# Altium PCB cover.PcbDoc
Units mm, origin at the board's own origin, x right, y up, seen from the top; angles counter-clockwise.
Board outline 14.78 x 71.02 mm, 2 copper layers (Top1, Bottom2), stack 1.071 mm thick; 1 components, 75 nets, 24 pads, 0 vias.
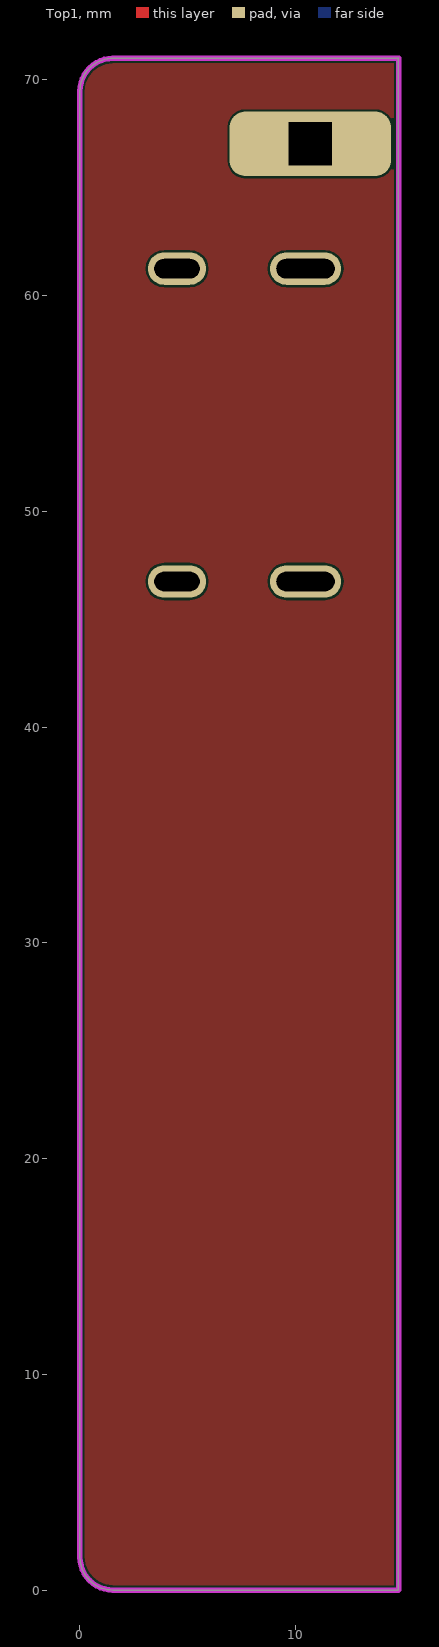
[diagram p0: Top1 view]
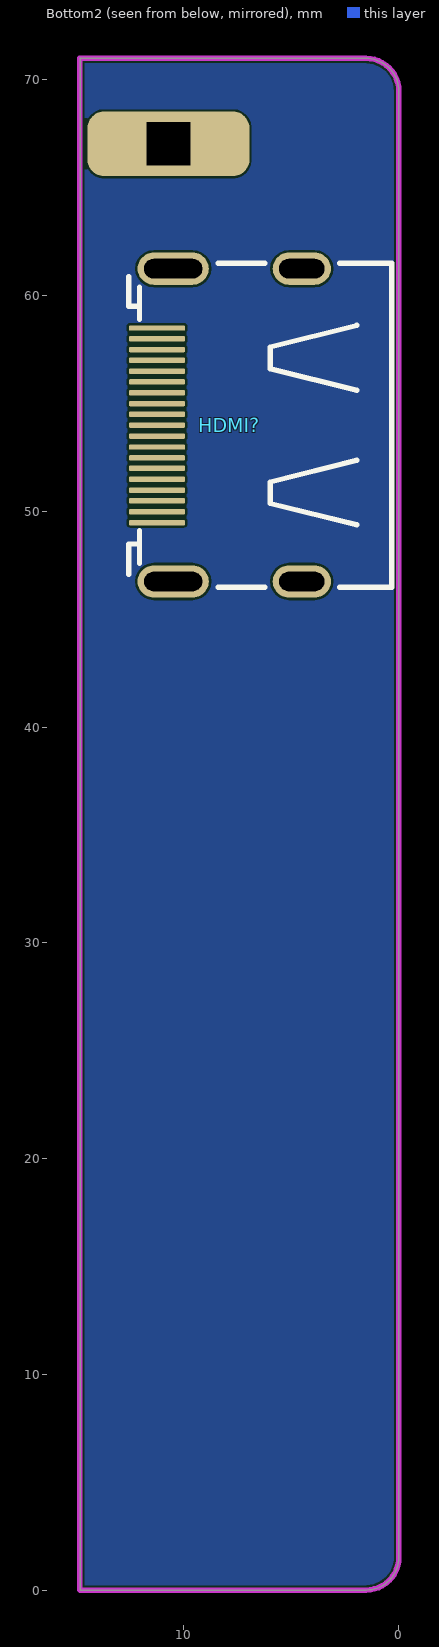
[diagram p1: Bottom2 view, seen from below]

## Layer stack, top to bottom
Top Solder: solder mask 0.0102, Solder Resist, Dk 3.5
Top1: signal copper 0.0356
Dielectric1: core 1, FR-4, Dk 4.2
Bottom2: signal copper 0.0356
Bottom Solder: solder mask 0.0102, Solder Resist, Dk 3.5

## Board outline
0,1.524 ccw(c1.524,1.524) 1.524,0 14.757,0 14.765,0.051 14.765,71.018 14.783,71 1.524,71 ccw(c1.524,69.476) 0,69.476

## Design rules (kind name [scope] priority, off if disabled: settings)
Clearance [All] p1: gap=0.102 ignorepadtopadclearanceinfootprint=FALSE except(0: Arc-Hole Track-Hole SMDPad-Hole THPad-Hole Via-Hole Fill-Hole Poly-Hole Region-Hole Text-Hole)
ComponentClearance [All] p1: gap=0 collisioncheckmode=3 verticalgap=0 showdistances=FALSE
DiffPairsRouting [All] p1: maxlimit=2.54 minlimit=0.102 mostfreqgap=0.102 toplayer_minwidth=0.102 toplayer_maxwidth=0.381 toplayer_prefwidth=0.102 bottomlayer_minwidth=0.102 bottomlayer_maxwidth=0.381 bottomlayer_prefwidth=0.102 maxuncoupledlength=12.7
FanoutControl Fanout_BGA [All] p1: bgadir=Out bgaviamode=Centered fanoutstyle=Auto fanoutdirection=Alternating viagrid=0.025 // Fanout_BGA (Default Rule)
HoleSize [All] p1: absolutevalues=TRUE maxlimit=254 minlimit=0.203 maxpercent=80.000 minpercent=20.000
MinimumSolderMaskSliver [All] p1 off: minsoldermaskwidth=0.051
PlaneClearance [All] p1: clearance=0.203
PlaneConnect [All] p1: planeconnectstyle=Direct reliefexpansion=0.508 reliefentries=4 reliefconductorwidth=0.254 reliefairgap=0.254
PolygonConnect [All] p1: connectstyle=Direct reliefconductorwidth=0.254 reliefentries=4 polygonreliefangle="90 Angle" airgapwidth=0.254
RoutingVias [All] p1: holewidth=0.203 width=0.406 viastyle="Through Hole" minholewidth=0.152 minwidth=0.305 maxholewidth=0.711 maxwidth=1.27
SilkToSilkClearance [All] p1: silktosilkclearance=0
SilkToSolderMaskClearance [IsPad] p1: minsilkscreentomaskgap=0 clearancetoexposedcopper=TRUE
SolderMaskExpansion [All] p1: expansion=0.076 istentingtop=FALSE
Width GND [(InNet('AGND') OR InNet('GND'))] p1: maxlimit=1.27 minlimit=0.102 preferedwidth=0.254
Width VCC [(InNet('VDD_SYS_3.3V') OR InNet('VDD_AV_3.3V') OR InNet('VDD_5V') OR InNet('VDD1V2-SYS') OR InNet('VDD1V1-EPHY') OR InNet('VDD-CPUX') OR InNet('NetC15_2') OR InNet('NetC9_2') OR InNet('NetC12_2'))] p2: maxlimit=1.27 minlimit=0.102 preferedwidth=0.254
Width [All] p3: maxlimit=254 minlimit=0.102 preferedwidth=0.102
21 further rules are at their usual default settings.

## Classes and differential pairs
differential pair MIPI1_DC: +MIPI1_DC_P -MIPI1_DC_N
differential pair MIPI1_D3: +MIPI1_D3_P -MIPI1_D3_N
differential pair MIPI1_D2: +MIPI1_D2_P -MIPI1_D2_N
differential pair MIPI1_D1: +MIPI1_D1_P -MIPI1_D1_N
differential pair MIPI1_D0: +MIPI1_D0_P -MIPI1_D0_N
differential pair HDMID2: +HDMID2_P -HDMID2_N
differential pair HDMID1: +HDMID1_P -HDMID1_N
differential pair HDMID0: +HDMID0_P -HDMID0_N
differential pair HDMIC: +HDMIC_P -HDMIC_N

## Components (designator, comment, footprint, x,y, rotation, side; value= is the part's Value field where it differs from the comment)
HDMI? "HDMI-SWM-19" HDMI-SWM-19 5.66,54 r270 bottom locked

## Footprints (in the part's own frame and the unit in brackets; to place one, negate y for a bottom-side part, rotate by r counter-clockwise, add the part's x,y. Pads: shape width x height; smd on the part's side, far side on the other; paste and mask are expansions set on the pad)
HDMI-SWM-19 [mm] "HDMI-SWM-19"
  rrect50% 0.254x2.6 smd: 1(-4.5,-5.55) 2(-4,-5.55) 3(-3.5,-5.55) 4(-3,-5.55) 5(-2.5,-5.55) 6(-2,-5.55) 7(-1.5,-5.55) 8(-1,-5.55) 9(-0.5,-5.55) 10(0,-5.55) 11(0.508,-5.55) 12(1.016,-5.55) 13(1.524,-5.55) 14(2.007,-5.55) 15(2.515,-5.55) 16(3.023,-5.55) 17(3.505,-5.55) 18(4.013,-5.55) 19(4.521,-5.55)
  oval 1.5x2.7 hole 2.1 slot 0.9 at 0 deg: SH1(-7.25,1.16) SH2(7.25,1.16)
  oval 1.5x3.3 hole 2.7 slot 0.9 at 0 deg: SH3(-7.25,-4.8) SH4(7.25,-4.8)
  silkscreen extent -7.5,-6.86 7.52,5.33, body extent -7.5,-6.78 7.5,5.22, height 6.14

## Part data
HDMI?: library part HDMI-MC34931HDMI-SWM-19

## Free pads (board coordinates)
  rrect50% 7.5x3 hole 2 square: ""(10.678,67.035)

## Nets (pads, with @x,y where several pads share a name; then routed paths per layer and width w, separated by ;. In a path a pad name is that pad's centre, name@x,y a point inside that pad or via, vN(x,y) a via of type N, cw(c..) or ccw(c..) an arc to the next point about the centre after c; other vN are vias at no path point)
27M_CLK_IN: 
27M_CLK_OUT: 
AVDD: 
EN_PHY: 
GND: HDMI?.2 HDMI?.5 HDMI?.8 HDMI?.11
HDMIC_N: HDMI?.12
HDMIC_P: HDMI?.10
HDMID0_N: HDMI?.9
HDMID0_P: HDMI?.7
HDMID1_N: HDMI?.6
HDMID1_P: HDMI?.4
HDMID2_N: HDMI?.3
HDMID2_P: HDMI?.1
HPD: HDMI?.19
MIPI1_D0_N: 
MIPI1_D0_P: 
MIPI1_D1_N: 
MIPI1_D1_P: 
MIPI1_D2_N: 
MIPI1_D2_P: 
MIPI1_D3_N: 
MIPI1_D3_P: 
MIPI1_DC_N: 
MIPI1_DC_P: 
Net2_3: 
Net*1_1: 
Net*2_1: 
NetC12_2: 
NetC16_2: 
NetC17_1: 
NetC19_1: 
NetC19_2: 
NetC20_2: 
NetC21_2: 
NetC23_2: 
NetC24_2: 
NetD1_1: 
NetD2_1: HDMI?.18
NetJ2_2: 
NetL1_1: 
NetL2_1: 
NetL4_1: 
NetQ1_1: 
NetR1_1: 
NetR3_1: 
NetR4_1: 
NetR8_1: 
NetR10_1: 
NetR12_2: 
NetR19_2: 
NetR20_2: 
NetR23_1: 
NetR29_2: 
NetR30_2: 
NetU5_1: 
NetU5_14: 
NetU5_16: 
NetU*1_27: 
NetU*1_28: 
NetU*1_29: 
NetU*1_31: 
R_DDC_SCL: HDMI?.15
R_DDC_SDA: HDMI?.16
R_I2C_SCL: 
R_I2C_SDA: 
RST: 
V_MIPI: 
VBUS_A2: 
VCC_1V2: 
VCC_1V8: 
VCC_3V3: 
VLED+: 
VLED-: 
VSN: 
VSP: 
pads on no net: HDMI?.13 HDMI?.14 HDMI?.17 HDMI?.SH1 HDMI?.SH2 HDMI?.SH3 HDMI?.SH4

## Polygon pours and split planes (outlines as drawn)
no net on Top1 "NONET_L01_P001" (solid, pour order 1): 14.757,70.993 0,70.993 0,0.025 14.732,0.025 14.757,0
no net on Top1 "NONET_L01_P000" (solid, pour order 0): 14.757,70.993
no net on Bottom2 "NONET_L02_P003" (solid, pour order 3): 14.834,70.968 0.076,70.968 0.076,0 14.808,0 14.834,-0.025

## Keep-outs
Keep-Out Layer:
  lines w0.254: 14.757,0 1.524,0 cw(c1.524,1.524) 0,1.524 0,69.476 cw(c1.524,69.476) 1.524,71 14.783,71 14.783,0.025

## Silkscreen, mask and mechanical layers (free items; w line width, h text height)
Top Solder:
  region: 6.35,56.896 7.62,54.356 6.35,51.816
  lines w0.178: 9.703,5.156 9.83,5.156 ; 9.703,5.537 10.846,5.537 ; 9.728,2.184 9.855,2.184 ; 9.728,2.565 10.871,2.565 ; 9.728,3.708 9.855,3.708 ; 9.728,4.089 10.871,4.089 ; 10.211,5.156 10.338,5.156 ; 10.236,2.184 10.363,2.184 ; 10.236,3.708 10.363,3.708 ; 10.719,5.156 10.846,5.156 ; 10.744,2.184 10.871,2.184 ; 10.744,3.708 10.871,3.708
  lines w0.254: 2.667,17.653 2.667,43.764
  lines w1.778: 14.707,0 1.524,0 cw(c1.524,1.524) 0,1.524 0,69.476 cw(c1.524,69.476) 1.524,71 14.986,71
  text "HDMI-IN" at 3.454,59.258 h3.05 r270
  text "WWW.PENGZHIHUI.XYZ" at 3.861,43.409 h2.54 r270
  text "PocketLCD" at 7.874,42.469 h5.08 r270
  text "1920x1080" at 6.858,16.51 h2.03 r270
  text "| 5.5'" at 8.89,16.51 h3.81 r270
  text "5V     3A" at 7.722,4.877 h1.52
  text "9V     2A" at 7.747,3.429 h1.52
  text "12V     1.5A" at 7.112,1.905 h1.52